# Altium PCB 信号采集板.PcbDoc (part 2 of 4)
Units mil, origin at the board's own origin, x right, y up, seen from the top; angles counter-clockwise.
Board outline 5905.51 x 1775.59 mil, 2 copper layers (Top Layer, Bottom Layer); 203 components, 126 nets, 643 pads, 227 vias.
Unrouted connection lines stored in the file: 2.
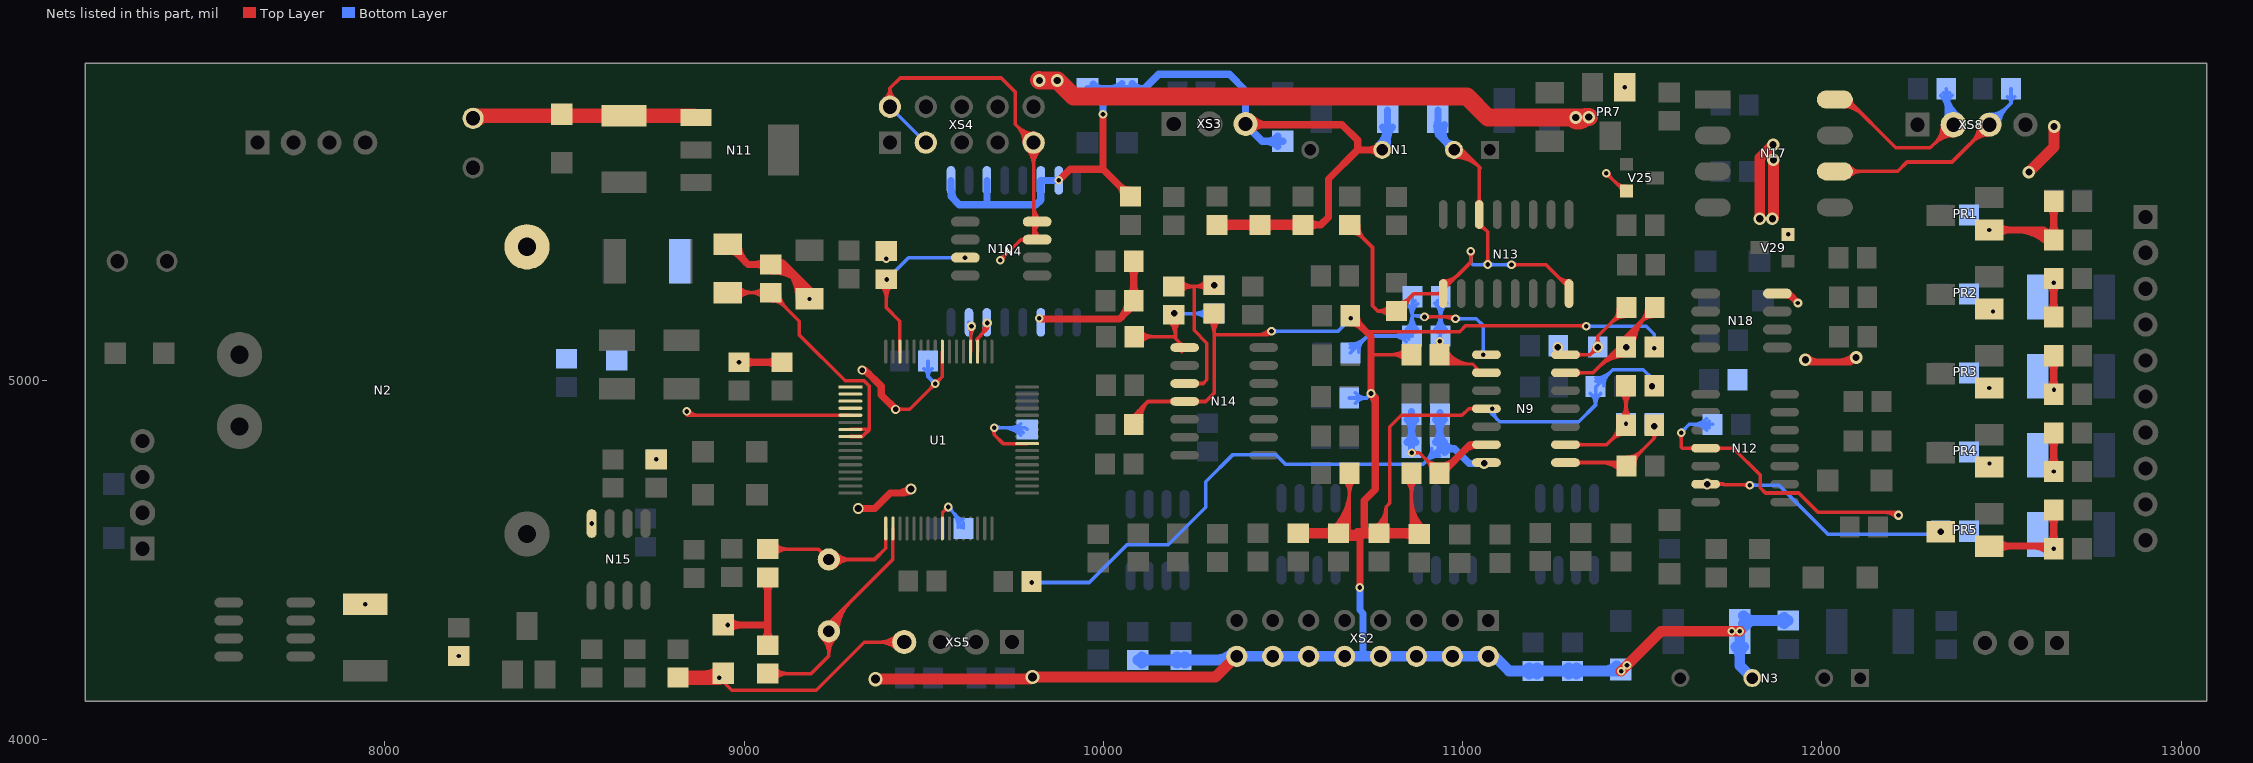
[diagram p2: the nets of this part, all layers, seen from the top]

## Via types
v1: diameter 24, hole 13, Top Layer to Bottom Layer, 112 vias
v2: diameter 30, hole 18, Top Layer to Bottom Layer, 58 vias
v3: diameter 25, hole 12, Top Layer to Bottom Layer, 22 vias
v4: diameter 26, hole 13, Top Layer to Bottom Layer, 17 vias
v5: diameter 35, hole 20, Top Layer to Bottom Layer, 12 vias
v6: diameter 40, hole 25, Top Layer to Bottom Layer, 2 vias
v7: diameter 30, hole 20, Top Layer to Bottom Layer, 2 vias
v8: diameter 25, hole 15, Top Layer to Bottom Layer, 2 vias

## Nets (pads, with @x,y where several pads share a name; then routed paths per layer and width w, separated by ;. In a path a pad name is that pad's centre, name@x,y a point inside that pad or via, vN(x,y) a via of type N, cw(c..) or ccw(c..) an arc to the next point about the centre after c; other vN are vias at no path point) (continued)
DGND: C14.2 C29.2 C30.2 C31.2 C32.2 C39.1 C40.1 C41.1 C42.1 C43.1 N4.3 N10.3 N10.4 R27.2 U1.25 U1.40 U1.56 XS4.2 XS4.3 XS4.9 | length 5881.3
  Top Layer w8: U1.25@9551.91,4588.3 9551.91,4631.9 v1(9568,4648) ; v1@9560,4648 cw(c9540.69,4648) 9554.34,4634.34 cw(c9568,4620.69) v1@9568,4640
  Top Layer w10: XS4.2@9390.73,5783.04 ccw(c9368.98,5813) 9406,5813 ; C32.2@9391.05,5343.95 ccw(c9379.1,5355.9) 9396,5355.9 ccw(c9412.9,5355.9) C32.2@9400.95,5343.95 ; v1(9396,5339) C32.2@9396,5360.74 ; XS4.2@9396.6,5774.95 ccw(c9383.22,5793.38) 9406,5793.38 ccw(c9428.78,5793.38) XS4.2@9415.4,5774.95 ; XS4.2@9406,5762 9406,5813 ; XS4.2@9421.27,5783.04 cw(c9443.02,5813) 9406,5813 ; v8(9422,4920) 9461,4920 v1(9532,4991) 9551.91,5010.9 U1.56@9551.91,5080.42 ; v8@9427.3,4914.7 cw(c9440.11,4901.89) 9440.11,4920 cw(c9440.11,4938.11) v8@9427.3,4925.3 ; v1@9525,4991 cw(c9508.1,4991) 9520.05,4979.05 cw(c9532,4967.1) v1@9532,4984 ; v1@9532,4998 ccw(c9532,5014.9) 9543.95,5002.95 ccw(c9555.9,4991) v1@9539,4991 ; v1@9691.05,4864.05 cw(c9679.1,4852.1) 9696,4852.1 cw(c9712.9,4852.1) v1@9700.95,4864.05 ; v1(9696,4869) 9696,4849.52 9721,4824.52 U1.40@9788.12,4824.52 ; v1(9713,5335) 9770,5392 ; v1@9713,5342 ccw(c9713,5358.9) 9724.95,5346.95 ccw(c9736.9,5335) v1@9720,5335 ; XS4.9@9780,5662 ccw(c9717.23,5662) 9761.62,5706.38 ccw(c9806,5750.77) XS4.9@9806,5688 ; N10.3@9783.26,5386.03 ccw(c9770,5374.28) 9770,5392 ; N10.3@9783.26,5397.97 cw(c9770,5409.72) 9770,5392 ; XS4.9@9787.62,5643.62 cw(c9743.23,5599.23) 9806,5599.23 cw(c9868.77,5599.23) XS4.9@9824.38,5643.62 ; XS4.9@9790,5662 ccw(c9751.37,5662) 9778.69,5689.31 ccw(c9806,5716.63) XS4.9@9806,5678 ; XS4.9@9794.69,5650.69 cw(c9767.37,5623.37) 9806,5623.37 cw(c9844.63,5623.37) XS4.9@9817.31,5650.69 ; N10.3@9806,5400.77 cw(c9851.23,5400.77) N10.4@9821.85,5435.16 ; 9806,5413.73 ccw(c9837.73,5413.73) N10.3@9815.29,5391.29 ; 9806,5422.47 cw(c9832.69,5422.47) N10.4@9815.35,5442.76 ; N10.4@9806,5437.87 ccw(c9861.87,5437.87) N10.3@9822.36,5398.36 ; 9806,5463.73 ccw(c9837.73,5463.73) N10.4@9815.29,5441.29 ; 9806,5487.87 ccw(c9861.87,5487.87) N10.4@9822.36,5448.36 ; 9406,5813 9435,5842 9716,5842 9755,5803 9755,5713 XS4.9@9806,5662 9806,5442 9806,5402 N10.3@9816,5392 9770,5392
  Top Layer w20: v1(8955,4319.76) R27.2@8942.52,4319.76 9064.24,4319.76 9066,4318 ; R27.2@8956.66,4305.61 cw(c8990.8,4271.47) 8990.8,4319.76 cw(c8990.8,4368.04) R27.2@8956.66,4333.9 ; v1(8986,5050.74) C30.2@9106,5050.74 ; C29.2@9000.38,5038.32 cw(c9030.36,5008.35) 9030.36,5050.74 cw(c9030.36,5093.13) C29.2@9000.38,5063.16 ; C40.1@9053.58,4275.68 ccw(c9023.61,4305.65) 9066,4305.65 ccw(c9108.39,4305.65) C40.1@9078.42,4275.68 ; C39.1@9053.58,4439.58 cw(c9023.61,4409.61) 9066,4409.61 cw(c9108.39,4409.61) C39.1@9078.42,4439.58 ; C40.1@9066,4263.26 9066,4318 ; C39.1@9066,4452 9066,4318 ; C30.2@9091.62,5038.32 ccw(c9061.64,5008.35) 9061.64,5050.74 ccw(c9061.64,5093.13) C30.2@9091.62,5063.16 ; v7(9318,4644) 9364,4644 9407,4687 9447,4687 9450,4690 9457,4690 v7(9465,4698) ; v8@9329,5026.5 cw(c9329,5001.15) 9346.92,5019.08 ; v8(9329,5029) 9337,5029 9382,4984 9382,4960 v8(9422,4920) ; 9426.37,4687 ccw(c9426.37,4736.63) v7@9461.46,4701.54 ; v1(9822,5173) 9824,5171 10045,5171 10084.74,5210.74 C14.2@10084.74,5222 C31.2@10084.74,5332 ; 10049.65,5175.65 ccw(c10007.26,5218.04) C14.2@10067.19,5219.58 ; C14.2@10072.32,5236.38 ccw(c10042.35,5266.36) 10084.74,5266.36 ccw(c10127.13,5266.36) C14.2@10097.16,5236.38 ; C31.2@10072.32,5317.62 cw(c10042.35,5287.64) 10084.74,5287.64 cw(c10127.13,5287.64) C31.2@10097.16,5317.62
  Top Layer w30: v6(9366,4169) 9797,4169 v6(9803,4175) 10312,4175 10380,4243 ; 9776.44,4169 ccw(c9776.44,4201.56) v6@9799.46,4178.54
  Bottom Layer w8: v1@9568,4640 cw(c9568,4620.69) 9581.66,4634.34 cw(c9595.31,4648) v1@9576,4648 ; v1(9568,4648) 9610.96,4605.04 C42.1@9610.96,4588.3 ; v1@9574.2,4641.8 cw(c9523.01,4590.61) C42.1@9595.4,4590.33 ; 9587.78,4628.22 cw(c9550.07,4590.51) C42.1@9603.4,4590.3 ; 9595.96,4620.04 ccw(c9610.96,4635.04) C42.1@9610.96,4613.83
  Bottom Layer w10: v1(9396,5339) v1@9406,5339 ; XS4.2@9406,5762 XS4.3@9506,5662 ; C41.1@9499.91,5032.98 cw(c9485.97,5011) 9512,5011 ; C41.1@9512,5054 9512,5011 ; C41.1@9524.09,5032.98 ccw(c9538.03,5011) 9512,5011 ; v1@9525,4991 ccw(c9508.1,4991) 9520.05,5002.95 ccw(c9532,5014.9) v1@9532,4998 ; v1(9532,4991) 9512,5011 ; v1(9696,4869) 9783.01,4869 C43.1@9788.12,4863.89 ; v1@9700.95,4864.05 cw(c9712.9,4852.1) 9712.9,4869 cw(c9712.9,4885.9) v1@9700.95,4873.95 ; 9719.36,4869 cw(c9719.36,4797.09) C43.1@9770.2,4847.94 ; 9743.5,4869 cw(c9743.5,4821.23) C43.1@9777.27,4855.01 ; 9744.03,4869 ccw(c9744.03,4906.02) C43.1@9770.2,4879.84
DP1: N4.6 U1.51 | length 175.1
  Top Layer w10: U1.51@9649.66,5109.56 cw(c9666.81,5109.56) 9654.68,5121.68 ; U1.51@9649.8,5109.15 cw(c9654.72,5112.94) 9650.33,5117.33 ; U1.51@9650.33,5080.42 9650.33,5117.33 ; 9658.33,5125.33 ccw(c9631.12,5152.54) v4@9669.1,5158.72 ; 9672.14,5139.14 ccw(c9654.88,5156.4) v4@9678.97,5160.32 ; v4(9677,5160) 9677,5144 9650.33,5117.33
  Bottom Layer w10: N4.6@9676,5162 N4.6@9677.81,5160.19
DP2: N4.7 U1.52 | length 108.3
  Top Layer w10: v4@9627.34,5145.34 cw(c9619.37,5137.37) 9630.65,5137.37 ; U1.52@9630.65,5080.42 9630.65,5148.65 v4(9633,5151) ; 9630.65,5126 cw(c9658,5126) v4@9638.66,5145.34
  Bottom Layer w10: N4.7@9626,5162 N4.7@9630.57,5157.43
FAULT1: N17.8 R68.1 XS8.2 | length 1229
  Top Layer w10: N17.8@12036,5782 12070.8,5782 12205.37,5647.43 12301.43,5647.43 XS8.2@12366,5712 ; N17.8@12061,5762 cw(c12061,5690.05) 12111.88,5740.93 ; N17.8@12061,5772 cw(c12061,5724.19) 12094.81,5758 ; N17.8@12081,5782 ccw(c12105.62,5782) 12088.21,5764.59 ; XS8.2@12335.57,5712 cw(c12262.1,5712) 12314.05,5660.05 cw(c12366,5608.1) XS8.2@12366,5681.57 ; XS8.2@12345.57,5712 cw(c12296.24,5712) 12331.12,5677.12 cw(c12366,5642.24) XS8.2@12366,5691.57
  Bottom Layer w10: R68.1@12330.05,5794.08 cw(c12291.54,5755.57) 12346,5755.57 cw(c12400.46,5755.57) R68.1@12361.95,5794.08 ; R68.1@12337.12,5801.15 cw(c12315.68,5779.71) 12346,5779.71 cw(c12376.32,5779.71) R68.1@12354.88,5801.15 ; 12346,5752.51 ccw(c12395.95,5752.51) XS8.2@12366.26,5712.35 ; 12346,5772.34 ccw(c12410.6,5772.34) XS8.2@12372.2,5720.39 ; R68.1@12346,5792.17 ccw(c12425.26,5792.17) XS8.2@12378.15,5728.43 ; XS8.2@12366,5712 12346,5732 R68.1@12346,5812 ccw(c12439.92,5812) XS8.2@12384.09,5736.47
FAULT2: N17.6 R69.1 XS8.3 | length 1085
  Top Layer w10: N17.6@12036,5582 12210.8,5582 12236.87,5608.06 12362.06,5608.06 XS8.3@12466,5712 ; N17.6@12075.14,5567.86 cw(c12109.28,5533.72) 12109.28,5582 cw(c12109.28,5630.28) N17.6@12075.14,5596.14 ; XS8.3@12437.54,5712 cw(c12368.82,5712) 12417.41,5663.41 cw(c12466,5614.82) XS8.3@12466,5683.54 ; XS8.3@12447.54,5712 cw(c12402.96,5712) 12434.48,5680.48 cw(c12466,5648.96) XS8.3@12466,5693.54
  Bottom Layer w10: XS8.3@12466,5712 12526,5772 ; XS8.3@12466,5730.46 ccw(c12466,5775.04) 12497.52,5743.52 ccw(c12529.04,5712) XS8.3@12484.46,5712 ; XS8.3@12466,5740.46 ccw(c12466,5809.18) 12514.59,5760.59 ccw(c12563.18,5712) XS8.3@12494.46,5712 ; R69.1@12515.18,5790.23 cw(c12505.22,5772) 12526,5772 ; R69.1@12526,5812 12526,5772 ; R69.1@12536.82,5790.23 ccw(c12546.78,5772) 12526,5772
GND: C2.2 C3.2 C4.2 C5.2 C7.2 C27.2 C28.2 C34.2 C35.2 C36.2 C44.2 C45.2 C48.2 C50.2 C51.2 C52.2 C53.2 C55.2 C56.2 C57.2 C58.2 C59.2 C60.2 C63.2 C64.2 C65.2 C66.2 C69.2 C70.2 N1.2 N2.3 N11.1 N12.11 N13.1 N13.8 N13.14 N15.4 N18.4 PR1.2 PR2.2 PR3.2 PR4.2 PR5.2 PR7.2 R27.1 R50.1 R51.1 R52.1 R53.1 R54.1 R73.2 R77.2 R81.2 U1.1 U1.2 U1.3 U1.4 U1.5 V7.2 V25.2 V29.2 XS5.4 | length 11566.8
  Top Layer w10: v1(8841,4914) 8851.74,4903.26 8872,4903.26 ; v1@8842.74,4903.26 8872,4903.26 ; R27.1@8931.02,4166.26 cw(c8931.02,4149.36) 8942.97,4161.31 cw(c8954.92,4173.26) R27.1@8938.02,4173.26 ; v1(8931.02,4173.26) 8966.28,4138 9201,4138 9335,4272 XS5.4@9446,4272 ; U1.5@9296,4903.26 8872,4903.26 ; XS5.4@9425.87,4251.87 ccw(c9377.28,4203.28) 9377.28,4272 ccw(c9377.28,4340.72) XS5.4@9425.87,4292.13 ; XS5.4@9432.94,4258.94 ccw(c9401.42,4227.42) 9401.42,4272 ccw(c9401.42,4316.58) XS5.4@9432.94,4285.06 ; C5.2@10686,5433.26 10749,5370.26 10749,5208 10763.74,5193.26 ; C5.2@10687.97,5410.7 cw(c10687.97,5360.99) 10723.12,5396.14 ; C5.2@10700.53,5433.26 ccw(c10735.6,5433.26) C5.2@10710.8,5408.46 ; C5.2@10710.53,5433.26 ccw(c10769.74,5433.26) 10727.87,5391.39 ; C48.2@10797.18,5178.26 ccw(c10763.74,5148.49) 10763.74,5193.26 ; C48.2@10797.18,5208.26 cw(c10763.74,5238.03) 10763.74,5193.26 ; C48.2@10804.65,5184.91 ccw(c10786.03,5168.33) 10786.03,5193.26 ccw(c10786.03,5218.19) C48.2@10804.65,5201.61 ; C48.2@10817.97,5215.82 ccw(c10817.97,5265.53) 10853.12,5230.38 ; C48.2@10830.53,5193.26 cw(c10865.6,5193.26) C48.2@10840.8,5218.06 ; C48.2@10840.53,5193.26 cw(c10899.74,5193.26) 10857.87,5235.13 ; N13.1@10941.05,5237.05 ccw(c10929.1,5225.1) 10929.1,5242 ccw(c10929.1,5258.9) N13.1@10941.05,5246.95 ; N13.1@10946,5257 ccw(c10946,5266.66) N13.1@10952.83,5259.83 ; N13.1@10946,5267 ccw(c10946,5300.8) 10969.9,5276.9 ; N13.1@10946,5277 ccw(c10946,5334.94) 10986.97,5293.97 ; N1.2@10976,5622 cw(c10976,5518.19) 11049.41,5591.59 ; N1.2@10976,5632 cw(c10976,5552.33) 11032.33,5608.67 ; 11015.26,5625.74 ccw(c10976,5586.47) N1.2@10976,5642 10999,5642 11046,5595 N13.14@11046,5462 11046,5438 11070,5414 v1(11070,5323) ; v1@11018.05,5355.05 cw(c11006.1,5343.1) 11023,5343.1 cw(c11039.9,5343.1) v1@11027.95,5355.05 ; v1(11023,5360) 11023,5330 10946,5253 N13.1@10946,5242 10864.74,5242 C48.2@10816,5193.26 10763.74,5193.26 ; N13.14@11041.05,5494.95 ccw(c11029.1,5506.9) 11046,5506.9 ccw(c11062.9,5506.9) N13.14@11050.95,5494.95 ; N13.14@11046,5427 cw(c11046,5400.44) 11064.78,5419.22 ; v1@11065.05,5327.95 ccw(c11053.1,5339.9) 11070,5339.9 ccw(c11086.9,5339.9) v1@11074.95,5327.95 ; v1(11136,5322) 11232,5322 11296,5258 N13.8@11296,5242 ; v1@11140.95,5317.05 cw(c11152.9,5305.1) 11152.9,5322 cw(c11152.9,5338.9) v1@11140.95,5326.95 ; 11263.56,5290.44 ccw(c11296,5322.87) N13.8@11296,5277 ; 11280.64,5273.36 ccw(c11296,5288.73) N13.8@11296,5267 ; v1@11400,5570 cw(c11400,5553.1) 11411.95,5565.05 cw(c11423.9,5577) v1@11407,5577 ; v1(11400,5577) 11450,5527 V25.2@11456,5527 ; 11423.56,5553.44 ccw(c11456,5585.87) V25.2@11456,5540 ; V25.2@11438.05,5538.95 cw(c11426.1,5527) V25.2@11443,5527 ; v1@11603.05,4850.05 cw(c11591.1,4838.1) 11608,4838.1 cw(c11624.9,4838.1) v1@11612.95,4850.05 ; v1(11608,4855) 11608,4815 11611.23,4811.77 N12.11@11676.16,4811.77 11753.23,4811.77 11828,4737 11828,4702 11843,4687 11935,4687 11989,4633 12209,4633 12213,4629 v4(12213,4625) ; N12.11@11643.21,4806.82 ccw(c11631.26,4794.87) 11631.26,4811.77 ccw(c11631.26,4828.67) N12.11@11643.21,4816.72 ; N12.11@11709.11,4806.82 cw(c11721.06,4794.87) 11721.06,4811.77 cw(c11721.06,4828.67) N12.11@11709.11,4816.72 ; 12174.37,4633 cw(c12174.37,4586.37) v4@12207.34,4619.34 ; 12198.51,4633 cw(c12198.51,4610.51) v4@12214.41,4626.41 ; 8872,4903.26 cw(c8872,4932.21) 8847.04,4917.55 ccw(c8872,4932.21) 8872,4903.26 ; v1@8838.41,4912.48 ccw(c8854.53,4921.95) 8854.53,4903.26 cw(c8854.53,4921.95) v1@8838.41,4912.48
  Top Layer w20: C27.2@8954.66,5379.44 9010.92,5323.18 C28.2@9074.66,5323.18 9111.82,5323.18 ; C27.2@8964.03,5359.44 cw(c8964.03,5333.78) C27.2@8982.18,5351.92 ; C27.2@8984.03,5379.44 ccw(c9054.94,5379.44) 9004.8,5329.3 ; C28.2@9060.28,5310.77 ccw(c9030.3,5280.79) 9030.3,5323.18 ccw(c9030.3,5365.57) C28.2@9060.28,5335.6 ; C28.2@9075.2,5325.16 cw(c9092.26,5301.6) 9112.83,5322.17 ; C28.2@9076.63,5305.62 cw(c9076.63,5178.28) 9166.68,5268.32 ; C28.2@9076.63,5325.62 cw(c9076.63,5246.56) 9132.53,5302.47 ; C28.2@9086.93,5308.96 cw(c9106.19,5282.37) 9129.41,5305.59 ; C28.2@9090.66,5312.62 cw(c9111.82,5296.7) 9111.82,5323.18 ; C28.2@9090.66,5333.74 ccw(c9111.82,5349.66) 9111.82,5323.18 ; 9114.12,5320.88 cw(c9020.25,5227) V7.2@9153.01,5227 ; 9148.26,5286.74 cw(c9088.53,5227) V7.2@9173.01,5227 ; v3(9182.38,5227) 9182.38,5252.62 9111.82,5323.18 ; N18.4@11876,5242 11907,5242 v3(11933,5216) ; N18.4@11902,5238 cw(c11902,5216.27) 11917.36,5231.64 ; v5(11954,5058) 11960,5052 12079,5052 12091,5064 v5(12095,5064) ; v5@11959.3,5063.3 ccw(c11986.59,5090.59) 11986.59,5052 ; 12047.92,5052 ccw(c12047.92,5111.08) v5@12089.7,5069.3 ; PR5.2@12465.84,4539.09 12637.89,4539.09 v3(12644.98,4532) C55.2@12644.98,4639.42 ; v3(12465.84,5419.09) 12617.24,5419.09 R54.1@12644.98,5391.35 C59.2@12644.98,5498.77 ; PR5.2@12489.49,4525.28 cw(c12522.83,4491.94) 12522.83,4539.09 cw(c12522.83,4586.23) PR5.2@12489.49,4552.89 ; PR1.2@12489.49,5405.28 cw(c12522.83,5371.94) 12522.83,5419.09 cw(c12522.83,5466.23) PR1.2@12489.49,5432.89 ; 12540.38,5419.09 cw(c12540.38,5288.72) R54.1@12632.56,5380.9 ; 12588.66,5419.09 cw(c12588.66,5337.01) R54.1@12646.7,5395.05 ; 12590.23,4539.09 cw(c12590.23,4479.22) R50.1@12632.56,4521.55 ; 12614.94,4539.09 ccw(c12614.94,4564) 12632.56,4546.38 ccw(c12602.59,4576.36) 12644.98,4576.36 ccw(c12687.37,4576.36) R50.1@12657.39,4546.38 ; R50.1@12621.83,4539.09 cw(c12621.83,4508.86) R50.1@12643.21,4530.23 ; R54.1@12627.44,5394.19 ccw(c12595.89,5395.77) 12618.23,5418.1 ccw(c12637.28,5437.15) R54.1@12641.94,5410.61 ; C55.2@12632.56,4625.03 cw(c12602.59,4595.06) 12644.98,4595.06 cw(c12687.37,4595.06) C55.2@12657.39,4625.03 ; R51.1@12632.56,4761.22 ccw(c12602.59,4791.2) 12644.98,4791.2 ccw(c12687.37,4791.2) R51.1@12657.39,4761.22 ; C56.2@12632.56,4839.87 cw(c12602.59,4809.9) 12644.98,4809.9 cw(c12687.37,4809.9) C56.2@12657.39,4839.87 ; R52.1@12632.56,4976.06 ccw(c12602.59,5006.04) 12644.98,5006.04 ccw(c12687.37,5006.04) R52.1@12657.39,4976.06 ; C57.2@12632.56,5054.71 cw(c12602.59,5024.74) 12644.98,5024.74 cw(c12687.37,5024.74) C57.2@12657.39,5054.71 ; R53.1@12632.56,5190.9 ccw(c12602.59,5220.87) 12644.98,5220.87 ccw(c12687.37,5220.87) R53.1@12657.39,5190.9 ; C58.2@12632.56,5269.55 cw(c12602.59,5239.57) 12644.98,5239.57 cw(c12687.37,5239.57) C58.2@12657.39,5269.55 ; R54.1@12632.56,5405.74 ccw(c12602.59,5435.71) 12644.98,5435.71 ccw(c12687.37,5435.71) R54.1@12657.39,5405.74 ; C59.2@12632.56,5484.39 cw(c12602.59,5454.41) 12644.98,5454.41 cw(c12687.37,5454.41) C59.2@12657.39,5484.39 ; v3(12644.98,4746.84) C56.2@12644.98,4854.26 ; R52.1@12644.98,4961.68 C57.2@12644.98,5069.1 ; R53.1@12644.98,5176.51 C58.2@12644.98,5283.93
  Top Layer w30: v5(11827,5450) 11827,5607 11827,5619 v5(11864,5656) ; v5(11862,5450) 11865,5453 v5(11865,5614) ; v5(12576,5580) 12646,5650 v5(12646,5707)
  Top Layer w40: C3.2@8246,5729.8 8253.2,5737 C4.2@8666,5737 8861,5737 N11.1@8866,5732 ; C3.2@8252.74,5723.06 cw(c8286.4,5689.4) 8286.4,5737 ; 8459.31,5737 ccw(c8459.31,5773.97) C2.2@8485.45,5747.83 ; C2.2@8499.59,5747.83 ccw(c8525.73,5773.97) 8525.73,5737 ; C64.2@8816,4173.26 v1(8931.02,4173.26) R27.1@8942.52,4184.76 ; 8890.62,4173.26 ccw(c8890.62,4236.65) R27.1@8935.45,4191.83
  Top Layer w50: v5@9821,5836 v5(9822,5835) v5(9872,5835) 9917,5790 11012,5790 11070,5732 v5@11341,5732 ; v5@11312.9,5724.8 ccw(c11320.87,5752.13) v5@11341,5732 ; v5@11313.36,5724.68 ccw(c11320.12,5754.88) v5@11342,5733 ; v5(11351,5733) v5@11342,5733 ; v5@11341,5732 v5@11342,5733
  Bottom Layer w10: v1@11018.05,5355.05 cw(c11006.1,5343.1) 11023,5343.1 cw(c11039.9,5343.1) v1@11027.95,5355.05 ; v1(11023,5360) 11023,5330 11022,5329 11029,5322 v1@11071,5322 ; 11050.69,5322 ccw(c11050.69,5342.31) v1@11065.05,5327.95 ; 11055.51,5322 cw(c11055.51,5308.51) v1@11065.05,5318.05 ; v1(11070,5323) v1@11071,5322 ; v1@11074.95,5318.05 cw(c11084.49,5308.51) 11084.49,5322 ; v1@11074.95,5327.95 ccw(c11089.31,5342.31) 11089.31,5322 ; v1@11131.05,5317.05 ccw(c11119.1,5305.1) 11119.1,5322 ccw(c11119.1,5338.9) v1@11131.05,5326.95 ; v1(11136,5322) v1@11071,5322 ; v1(11608,4855) 11631,4878 C44.2@11695.26,4878 ; v1@11608,4862 ccw(c11608,4878.9) 11619.95,4866.95 ccw(c11631.9,4855) v1@11615,4855 ; C44.2@11679.31,4862.05 ccw(c11640.8,4823.54) 11640.8,4878 ccw(c11640.8,4932.46) C44.2@11679.31,4893.95 ; C44.2@11686.38,4869.12 ccw(c11664.94,4847.68) 11664.94,4878 ccw(c11664.94,4908.32) C44.2@11686.38,4886.88 ; v4(12213,4625) v4@12214,4625
  Bottom Layer w20: C7.2@10931,5719.5 ccw(c10964.75,5705.13) 10938.81,5679.19 ; C7.2@10931,5752 10931,5687 N1.2@10976,5642 ; C7.2@10949.4,5711.66 ccw(c10994.11,5692.62) N1.2@10959.75,5658.25 ; N1.2@10961,5642 ccw(c10924.79,5642) 10950.39,5667.61 ccw(c10976,5693.21) N1.2@10976,5657
  other v1: 8576,4602 11451,5816
  other v3: 8206,4233.26 7946,4377 12466,4769 8756,4780.74 12646,4974 12465.84,4979.09 12476,5192 12644.98,5272 11906,5407
  other v5: 11315,5732
GNDISO1: C11.2 C12.1 C17.1 C18.1 C19.1 C20.1 C21.1 C22.1 C23.1 C24.1 C33.2 C54.2 N3.3 N9.11 N14.11 R2.1 R17.2 R18.2 R29.2 R31.2 R39.2 R41.2 R56.2 R58.2 XS2.2 XS2.4 XS2.6 XS2.8 XS2.10 XS2.12 XS2.14 XS2.16 | length 10115.3
  Top Layer w10: R56.2@10084.74,4902 10124.51,4941.77 ; R56.2@10087.25,4880.45 cw(c10125.22,4887.79) 10097.88,4915.14 ; R56.2@10097.07,4882.35 cw(c10147.54,4892.11) 10111.19,4928.45 ; R56.2@10106.89,4884.25 cw(c10169.85,4896.42) 10124.51,4941.77 ; N14.11@10193.21,4936.82 ccw(c10181.26,4924.87) 10181.26,4941.77 ccw(c10181.26,4958.67) N14.11@10193.21,4946.72 ; N14.11@10259.11,4936.82 cw(c10271.06,4924.87) 10271.06,4941.77 cw(c10271.06,4958.67) N14.11@10259.11,4946.72 ; R39.2@10292.33,5170.38 cw(c10253.82,5131.87) 10308.28,5131.87 cw(c10362.75,5131.87) R39.2@10324.24,5170.38 ; R39.2@10299.4,5177.45 cw(c10277.96,5156.01) 10308.28,5156.01 cw(c10338.6,5156.01) R39.2@10317.16,5177.45 ; R39.2@10308.28,5186.33 10308.28,5127 ; 10426.96,5127 ccw(c10426.96,5178.04) v1@10463.05,5141.95 ; 10451.1,5127 ccw(c10451.1,5153.9) v1@10470.12,5134.88 ; v1(10468,5137) 10458,5127 10308.28,5127 ; C21.1@10640.74,4590.94 ccw(c10534.53,4697.16) 10684.74,4697.16 ; C21.1@10647.82,4583.87 ccw(c10558.67,4673.02) 10684.74,4673.02 ; C21.1@10654.89,4576.8 ccw(c10582.81,4648.87) 10684.74,4648.87 ; C21.1@10661.96,4569.73 ccw(c10606.96,4624.73) 10684.74,4624.73 ; R41.2@10668.79,4724.08 cw(c10630.28,4685.57) 10684.74,4685.57 cw(c10739.2,4685.57) R41.2@10700.69,4724.08 ; C21.1@10669.03,4562.66 ccw(c10631.1,4600.59) 10684.74,4600.59 ; R41.2@10675.86,4731.15 cw(c10654.42,4709.71) 10684.74,4709.71 cw(c10715.06,4709.71) R41.2@10693.62,4731.15 ; C21.1@10676.1,4555.59 ccw(c10655.24,4576.45) 10684.74,4576.45 ; C21.1@10684,4569 10684.74,4569.74 R41.2@10684.74,4742 ; R58.2@10687.18,5180.19 10691.81,5180.19 R58.2@10694,5178 ; 10726,4574.99 10726,4594 ; 10736,5136 10992,5136 11009,5153 v1@11342,5153 ; 10747,5072 R17.2@10857.26,5072 ; C20.1@10756.86,4594.01 ccw(c10721.76,4649) 10787,4649 ; C20.1@10762.25,4585.58 ccw(c10733.41,4630.75) 10787,4630.75 ; C20.1@10767.04,4574.99 10787,4594.96 10787,4649 ; C20.1@10767.63,4577.15 ccw(c10745.06,4612.5) 10787,4612.5 ; R29.2@10841.31,4724.08 cw(c10802.8,4685.57) 10857.26,4685.57 cw(c10911.72,4685.57) R29.2@10873.21,4724.08 ; R17.2@10841.31,5056.05 ccw(c10802.8,5017.54) 10802.8,5072 ccw(c10802.8,5126.46) R17.2@10841.31,5087.95 ; R29.2@10848.38,4731.15 cw(c10826.94,4709.71) 10857.26,4709.71 cw(c10887.58,4709.71) R29.2@10866.14,4731.15 ; R17.2@10848.38,5063.12 ccw(c10826.94,5041.68) 10826.94,5072 ccw(c10826.94,5102.32) R17.2@10848.38,5080.88 ; 10857.26,4603.15 ccw(c10907.97,4603.15) C19.1@10872.11,4567.29 ; 10857.26,4627.29 ccw(c10932.11,4627.29) C19.1@10879.18,4574.36 ; 10857.26,4651.43 ccw(c10956.25,4651.43) C19.1@10886.25,4581.43 ; 10857.26,4675.57 ccw(c10980.4,4675.57) C19.1@10893.33,4588.5 ; R29.2@10857.26,4742 10857.26,4594.63 10876.9,4574.99 C19.1@10879.34,4572.55 ; N9.11@11033.21,4916.82 ccw(c11021.26,4904.87) 11021.26,4921.77 ccw(c11021.26,4938.67) N9.11@11033.21,4926.72 ; N9.11@11077.28,4916.82 ccw(c11065.33,4904.87) 11065.33,4921.77 ccw(c11065.33,4938.67) N9.11@11077.28,4926.72 ; v1(11082.23,4921.77) N9.11@11066.16,4921.77 ; 11322.27,5153 cw(c11322.27,5129.27) v1@11339.05,5146.05 ; 11331.93,5153 ccw(c11331.93,5163.07) v1@11339.05,5155.95 ; R31.2@11533.32,5092.94 R31.2@11533.4,5093.02 ; 10124.51,4941.77 N14.11@10226.16,4941.77 10284.77,4941.77 10308.28,4965.28 10308.28,5127 ; 10787,4649 10797,4659 10797,4871 10829,4903 10998,4903 11016.77,4921.77 N9.11@11066.16,4921.77 ; N9.11@11066.16,4921.77 ccw(c11066.16,4936.71) 11077.1,4926.54 cw(c11066.16,4936.71) N9.11@11066.16,4921.77 ; N9.11@11066.16,4921.77 cw(c11066.16,4906.83) 11077.1,4917 ccw(c11066.16,4906.83) N9.11@11066.16,4921.77
  Top Layer w20: R58.2@10687.18,5160.66 cw(c10687.18,5113.52) 10720.52,5146.85 ; R58.2@10687.18,5180.19 10745,5122.37 v1(10745,4964) 10757,4952 10757,4697 10726,4666 10726,4594 ; R58.2@10689,5171 cw(c10689,5153.21) R58.2@10701.58,5165.79 ; R58.2@10704.74,5178.22 ccw(c10742.38,5178.22) 10715.76,5151.61 ; v1(10714,4424) 10714,4569 ; v1@10743.59,4962.59 cw(c10711.2,4930.2) 10757,4930.2
  Top Layer w30: C22.1@10542.42,4574.99 C21.1@10654.73,4574.99 C21.1@10660.72,4569 ; C22.1@10553.27,4566.11 cw(c10574.71,4544.67) 10574.71,4574.99 cw(c10574.71,4605.31) C22.1@10553.27,4583.87 ; C21.1@10643.88,4566.11 ccw(c10622.44,4544.67) 10622.44,4574.99 ccw(c10622.44,4605.31) C21.1@10643.88,4583.87 ; C21.1@10665.58,4583.87 ccw(c10701.48,4619.78) 10701.48,4569 ; C21.1@10684,4569 10714,4569 ; 10708.01,4574.99 10726,4574.99 C20.1@10767.04,4574.99 C19.1@10876.9,4574.99 ; C20.1@10777.88,4566.11 cw(c10799.32,4544.67) 10799.32,4574.99 cw(c10799.32,4605.31) C20.1@10777.88,4583.87 ; 10841.16,4574.99 cw(c10841.16,4536.34) C19.1@10868.49,4563.67 ; v1(11457.5,4207.5) v1(11441,4191) 11552,4302 v1(11749,4302) v1(11771,4302) ; 10734.75,4574.99 ccw(c10734.75,4605.31) C20.1@10756.19,4583.87 ; 10734.75,4574.99 cw(c10734.75,4544.67) C20.1@10756.19,4566.11 ; 10734.75,4574.99 ccw(c10734.75,4605.31) C20.1@10756.19,4583.87 ; 10734.75,4574.99 cw(c10734.75,4544.67) C20.1@10756.19,4566.11 ; 10734.75,4574.99 ccw(c10734.75,4605.31) C20.1@10756.19,4583.87 ; 10734.75,4574.99 cw(c10734.75,4544.67) C20.1@10756.19,4566.11
  Bottom Layer w10: v1(10468,5137) 10653,5137 v1(10689,5173) ; v1@10472.95,5132.05 cw(c10484.9,5120.1) 10484.9,5137 cw(c10484.9,5153.9) v1@10472.95,5141.95 ; v1@10682,5173 cw(c10665.1,5173) 10677.05,5161.05 cw(c10689,5149.1) v1@10689,5166 ; C54.2@10684.43,4951.31 10732.31,4951.31 ; C54.2@10701.82,4936.94 cw(c10732.3,4911.78) 10732.3,4951.31 ; C54.2@10701.82,4965.67 ccw(c10732.3,4990.84) 10732.3,4951.31 ; v1(10745,4964) 10732.31,4951.31 ; v1@11079.39,4922.74 ccw(c11096.28,4916.96) 11083.66,4904.34 ; v1(11082.23,4921.77) 11082.23,4905.77 11103,4885 11323,4885 11369.92,4931.92 ; v1@11088.85,4919.5 ccw(c11113.18,4911.18) 11095,4893 ; v1(11344,5151) 11511,5151 11533,5129 v1(11533,5090) ; v1@11348.95,5146.05 cw(c11360.9,5134.1) 11360.9,5151 cw(c11360.9,5167.9) v1@11348.95,5155.95 ; C33.2@11355.22,4963.95 cw(c11327.7,4931.92) 11369.92,4931.92 ; C33.2@11369.92,4997.55 ccw(c11369.92,5035.28) C33.2@11396.6,5008.6 ; C33.2@11369.92,5007.55 ccw(c11369.92,5069.43) 11413.67,5025.67 ; C33.2@11384.62,4963.95 ccw(c11412.14,4931.92) 11369.92,4931.92 ; C33.2@11392.48,4984.99 cw(c11439.53,4984.99) 11406.26,5018.26 ; v2@11520.42,4991.53 ccw(c11507.8,5006) 11527,5006 ; v2(11527,4984) 11527,5006 ; v1@11528.05,5094.95 ccw(c11516.1,5106.9) 11533,5106.9 ccw(c11549.9,5106.9) v1@11537.95,5094.95 ; v2@11533.58,4991.53 cw(c11546.2,5006) 11527,5006 ; 11369.92,4931.92 C33.2@11369.92,4983.02 11371.02,4983.02 11418,5030 11503,5030 11527,5006
  Bottom Layer w20: v1(10714,4424) 10714,4361 10723,4352 10723,4234.47
  Bottom Layer w30: C24.1@10096,4222 C23.1@10216,4222 10361.04,4222 XS2.16@10371.51,4232.47 XS2.14@10471.51,4232.47 XS2.12@10571.51,4232.47 XS2.10@10671.51,4232.47 XS2.8@10771.51,4232.47 XS2.6@10871.51,4232.47 XS2.4@10971.51,4232.47 XS2.2@11071.51,4232.47 11088.83,4232.47 11129.31,4192 C18.1@11196,4192 C17.1@11306,4192 11435.72,4192 R2.1@11439.48,4195.76 ; C24.1@10106.85,4213.12 cw(c10128.29,4191.68) 10128.29,4222 cw(c10128.29,4252.32) C24.1@10106.85,4230.88 ; C23.1@10205.15,4213.12 ccw(c10183.71,4191.68) 10183.71,4222 ccw(c10183.71,4252.32) C23.1@10205.15,4230.88 ; C23.1@10226.85,4213.12 cw(c10248.29,4191.68) 10248.29,4222 cw(c10248.29,4252.32) C23.1@10226.85,4230.88 ; 10311.16,4222 ccw(c10311.16,4292.83) XS2.16@10361.24,4242.74 ; C18.1@11185.15,4183.12 ccw(c11163.71,4161.68) 11163.71,4192 ccw(c11163.71,4222.32) C18.1@11185.15,4200.88 ; C18.1@11206.85,4183.12 cw(c11228.29,4161.68) 11228.29,4192 cw(c11228.29,4222.32) C18.1@11206.85,4200.88 ; C17.1@11295.15,4183.12 ccw(c11273.71,4161.68) 11273.71,4192 ccw(c11273.71,4222.32) C17.1@11295.15,4200.88 ; C17.1@11316.85,4183.12 cw(c11338.29,4161.68) 11338.29,4192 cw(c11338.29,4222.32) C17.1@11316.85,4200.88 ; 11394.2,4192 ccw(c11394.2,4241.04) R2.1@11428.87,4206.36 ; C11.2@11760.39,4258.89 cw(c11734.79,4233.29) 11771,4233.29 cw(c11807.21,4233.29) C11.2@11781.61,4258.89 ; C11.2@11781.61,4323.89 cw(c11801.18,4304.32) 11801.18,4332 ; C11.2@11781.61,4345.11 ccw(c11813.25,4376.75) 11813.25,4332 ; N3.3@11806,4172 11771,4207 v1(11771,4302) 11801,4332 C12.1@11906,4332 ; C12.1@11895.15,4323.12 ccw(c11873.71,4301.68) 11873.71,4332 ccw(c11873.71,4362.32) C12.1@11895.15,4340.88
GNDISO2: C1.2 C13.1 C15.2 C16.2 N1.3 N4.9 N4.11 N4.14 N4.15 R1.1 R14.2 V2.A V4.A XS3.3 | length 3694.2
  Top Layer w20: v1(9876,5557) 9907,5588 9999,5588 ; v1(9999,5741) 9999,5588 ; 10043.37,5543.63 cw(c10011.74,5512) C13.1@10056.47,5512 ; 10045.71,5541.29 ccw(c10074.03,5569.61) C13.1@10074.03,5529.56 ; C13.1@10076,5512 10075,5512 9999,5588 ; XS3.3@10396,5712 10664.43,5712 10707.81,5668.61 10707.81,5642 ; XS3.3@10412.59,5697.41 cw(c10447.82,5662.18) 10447.82,5712 ; XS3.3@10412.59,5730.59 ccw(c10457.48,5775.48) 10457.48,5712 ; R14.2@10556,5433.26 10605.37,5433.26 10626.63,5454.52 10626.63,5560.82 10707.81,5642 ; R14.2@10570.38,5420.84 cw(c10600.36,5390.87) 10600.36,5433.26 cw(c10600.36,5475.65) R14.2@10570.38,5445.68 ; N1.3@10765.39,5631.39 ccw(c10739.79,5605.79) 10739.79,5642 ccw(c10739.79,5678.21) N1.3@10765.39,5652.61 ; N1.3@10776,5642 10707.81,5642
  Top Layer w30: C15.2@10316,5433.26 C16.2@10436,5433.26 R14.2@10556,5433.26 ; C15.2@10326.85,5424.38 cw(c10348.29,5402.94) 10348.29,5433.26 cw(c10348.29,5463.58) C15.2@10326.85,5442.14 ; C16.2@10425.15,5424.38 ccw(c10403.71,5402.94) 10403.71,5433.26 ccw(c10403.71,5463.58) C16.2@10425.15,5442.14 ; C16.2@10446.85,5424.38 cw(c10468.29,5402.94) 10468.29,5433.26 cw(c10468.29,5463.58) C16.2@10446.85,5442.14 ; R14.2@10545.15,5424.38 ccw(c10523.71,5402.94) 10523.71,5433.26 ccw(c10523.71,5463.58) R14.2@10545.15,5442.14
  Bottom Layer w20: N4.9@9576,5557 9576,5512 9599,5489 9641,5489 9656,5489 9813,5489 9826,5502 N4.14@9826,5557 v1(9876,5557) ; N4.9@9578,5528.94 ccw(c9620.72,5527.72) 9590.5,5497.5 ; 9676,5490 N4.11@9676,5557 ; V4.A@9956,5812 9999,5812 ; V4.A@9971.69,5799.1 cw(c9999,5776.65) 9999,5812 ; V4.A@9971.69,5824.9 ccw(c9999,5847.35) 9999,5812 ; v1(9999,5741) 9999,5812 ; V2.A@10051.64,5797.64 ccw(c10016.96,5762.96) 10016.96,5812 ccw(c10016.96,5861.04) V2.A@10051.64,5826.36 ; V2.A@10080.58,5797.85 cw(c10114.03,5765.38) 10114.03,5812 ; V2.A@10080.58,5826.15 ccw(c10114.03,5858.62) 10114.03,5812 ; R1.1@10485.34,5651.61 ccw(c10451.2,5617.47) 10451.2,5665.76 ccw(c10451.2,5714.04) R1.1@10485.34,5679.9 ; R1.1@10499.48,5665.76 10442.24,5665.76 10396,5712 10396,5807.2 10351.04,5852.16 10154.19,5852.16 10114.03,5812 ; N1.3@10765.39,5652.61 ccw(c10703.57,5714.43) C1.2@10791,5714.43 ; N1.3@10776,5642 10791,5657 C1.2@10791,5752 ; C1.2@10776.86,5705.36 cw(c10742.72,5671.22) 10791,5671.22 cw(c10839.28,5671.22) C1.2@10805.14,5705.36 ; N1.3@10779.54,5638.46 ccw(c10751.86,5666.14) 10791,5666.14 ; 9999,5812 V2.A@10066,5812 10114.03,5812
NetC25_1: C25.1 N9.2 R18.1 R20.1 | length 757.7
  Top Layer w10: N9.2@11286.16,4821.77 11400.81,4821.77 R20.1@11454.58,4875.54 R18.1@11454.58,4985.54 ; N9.2@11319.11,4816.82 cw(c11331.06,4804.87) 11331.06,4821.77 cw(c11331.06,4838.67) N9.2@11319.11,4826.72 ; 11412.71,4833.67 cw(c11454.58,4791.8) R20.1@11454.58,4851.02 ; 11417.46,4838.42 ccw(c11382.31,4873.57) R20.1@11432.02,4873.57 ; R20.1@11429.78,4850.74 cw(c11454.58,4825.94) R20.1@11454.58,4861.02 ; R20.1@11438.63,4893.46 ccw(c11400.12,4931.97) 11454.58,4931.97 ccw(c11509.04,4931.97) R20.1@11470.53,4893.46 ; R18.1@11438.63,4967.62 cw(c11400.12,4929.11) 11454.58,4929.11 cw(c11509.04,4929.11) R18.1@11470.53,4967.62 ; R20.1@11438.75,4859.71 ccw(c11418.43,4880.02) R20.1@11447.16,4880.02 ; R20.1@11445.7,4886.39 ccw(c11424.26,4907.83) 11454.58,4907.83 ccw(c11484.9,4907.83) R20.1@11463.46,4886.39 ; R18.1@11445.7,4974.69 cw(c11424.26,4953.25) 11454.58,4953.25 cw(c11484.9,4953.25) R18.1@11463.46,4974.69 ; R20.1@11449.36,4885.33 ccw(c11436.74,4897.94) R20.1@11454.58,4897.94 ; R20.1@11454.58,4898.32 ccw(c11472.96,4898.32) R20.1@11459.96,4885.33
  other v3: 11454.66,4880.02
NetC25_2: C25.2 N9.1 R20.2 R23.1 | length 661.6
  Top Layer w10: N9.1@11286.16,4771.77 11446.23,4771.77 R23.1@11456,4762 11533.32,4839.32 ; N9.1@11319.11,4766.82 cw(c11331.06,4754.87) 11331.06,4771.77 cw(c11331.06,4788.67) N9.1@11319.11,4776.72 ; 11382.71,4771.77 cw(c11382.71,4690.67) R23.1@11440.05,4748.02 ; 11406.85,4771.77 cw(c11406.85,4714.82) R23.1@11447.12,4755.09 ; 11420.37,4771.77 ccw(c11420.37,4799.6) R23.1@11440.05,4779.92 ; R23.1@11456,4776.53 ccw(c11456,4811.6) R23.1@11480.8,4786.8 ; R23.1@11456,4786.53 ccw(c11456,4845.74) 11497.87,4803.87 ; R23.1@11478.56,4763.97 cw(c11528.27,4763.97) 11493.12,4799.12 ; R20.2@11524.41,4852.85 cw(c11518.6,4839.32) 11533.32,4839.32 ; R20.2@11526.33,4865.95 cw(c11509.45,4849.07) R20.2@11533.32,4849.07 ; R20.2@11533.32,4848.69 cw(c11557.73,4848.69) R20.2@11540.47,4865.95 ; R20.2@11533.32,4875.54 11533.32,4839.32 ; R20.2@11542.23,4852.85 ccw(c11548.04,4839.32) 11533.32,4839.32
  other v2: 11533.4,4873.02
NetC26_1: C26.1 N9.9 R17.1 R19.1 | length 997.8
  Top Layer w8: R17.1@10927.12,5095.79 ccw(c10921.74,5109) v1(10936,5109) ; R17.1@10929.11,5065.15 ccw(c10966.14,5091.37) 10966.14,5046 ; v1@10930.34,5103.34 cw(c10916.69,5089.69) 10936,5089.69 cw(c10955.31,5089.69) v1@10941.66,5103.34 ; R17.1@10935.64,5069.78 ccw(c10981.6,5102.31) 10981.6,5046 ; R17.1@10942.17,5074.4 ccw(c10997.07,5113.26) 10997.07,5046 ; R17.1@10944.88,5095.79 cw(c10950.26,5109) v1(10936,5109) ; R17.1@10948.7,5079.02 ccw(c11012.53,5124.21) 11012.53,5046 ; R17.1@10955.23,5083.64 ccw(c11028,5135.15) 11028,5046 ; 11031.77,5042.23 cw(c11015.43,5025.89) N9.9@11038.16,5021.77 ; N9.9@11066.16,5021.77 11052.23,5021.77 11028,5046 ; v1(10936,5109) R17.1@10936,5072 10962,5046 11028,5046
  Bottom Layer w10: C26.1@10922.05,5141.92 ccw(c10883.54,5180.43) 10938,5180.43 ccw(c10992.46,5180.43) C26.1@10953.95,5141.92 ; R19.1@10923.05,5215.08 cw(c10886.95,5178.98) 10938,5178.98 ; C26.1@10929.12,5134.85 ccw(c10907.68,5156.29) 10938,5156.29 ccw(c10968.32,5156.29) C26.1@10946.88,5134.85 ; R19.1@10930.12,5222.15 cw(c10911.09,5203.13) 10938,5203.13 ; C26.1@10931.05,5113.95 ccw(c10914.27,5130.73) C26.1@10938,5130.73 ; C26.1@10938,5121.07 ccw(c10948.07,5121.07) C26.1@10940.95,5113.95 ; C26.1@10938,5124 10938,5232 R19.1@10939,5233 ; 10938,5174.15 cw(c10995.88,5174.15) R19.1@10954.95,5215.08 ; 10938,5198.3 cw(c10971.73,5198.3) R19.1@10947.88,5222.15
NetC26_2: C26.2 N9.8 R19.2 R21.1 | length 1216.8
  Top Layer w10: v1(10894,5177) 10975,5177 v1(10980,5172) ; v1@10898.95,5172.05 cw(c10910.9,5160.1) 10910.9,5177 cw(c10910.9,5193.9) v1@10898.95,5181.95 ; 10951.03,5177 cw(c10951.03,5143.03) v1@10975.05,5167.05 ; N9.8@11044.81,5071.77 N9.8@11066.16,5071.77
  Bottom Layer w10: R21.1@10688,5077 10735,5124 C26.2@10859.26,5124 10859.26,5180 ; R21.1@10688,5091.53 ccw(c10688,5126.6) R21.1@10712.8,5101.8 ; R21.1@10688,5101.53 ccw(c10688,5160.74) 10729.87,5118.87 ; R21.1@10710.56,5078.97 cw(c10760.27,5078.97) 10725.12,5114.12 ; C26.2@10843.31,5108.05 ccw(c10804.8,5069.54) 10804.8,5124 ccw(c10804.8,5178.46) C26.2@10843.31,5139.95 ; C26.2@10843.4,5142.01 ccw(c10805.84,5180) 10859.26,5180 ; R19.2@10844.53,5214.86 cw(c10810.63,5179.99) 10859.26,5179.99 ; C26.2@10850.38,5115.12 ccw(c10828.94,5093.68) 10828.94,5124 ccw(c10828.94,5154.32) C26.2@10850.38,5132.88 ; C26.2@10850.43,5134.9 ccw(c10829.52,5156.05) 10859.26,5156.05 ccw(c10889,5156.05) C26.2@10868.09,5134.9 ; 10859.26,5201.66 cw(c10885.3,5201.66) R19.2@10868.41,5221.47 ; R19.2@10860.26,5233 10859.26,5232 10859.26,5180 ; 10869.86,5180 cw(c10869.86,5152.86) v1@10889.05,5172.05 ; R19.2@10874.89,5213.86 ccw(c10903.77,5179.99) 10859.26,5179.99 ; C26.2@10875.12,5142.01 cw(c10912.68,5180) 10859.26,5180 ; v1(10894,5177) 10891,5180 10859.26,5180 ; v1(10980,5172) 11038,5172 11057,5153 v1(11057,5072) ; v1@10984.95,5167.05 cw(c10996.9,5155.1) 10996.9,5172 cw(c10996.9,5188.9) v1@10984.95,5176.95 ; v1@11052.05,5076.95 ccw(c11040.1,5088.9) 11057,5088.9 ccw(c11073.9,5088.9) v1@11061.95,5076.95
NetC27_1: C27.1 C28.1 U1.7 U1.8 | length 1166
  Top Layer w10: C27.1@8954.66,5244.44 9068.36,5244.44 9071.51,5241.29 C28.1@9074.66,5244.44 9154.1,5165 9154.1,5126.9 9282,4999 9334,4999 9349,4984 9349,4863.89 ; C27.1@8974.64,5233.83 cw(c9000.24,5208.23) 9000.24,5244.44 cw(c9000.24,5280.65) C27.1@8974.64,5255.05 ; C27.1@8981.71,5226.76 cw(c9024.39,5184.09) 9024.39,5244.44 cw(c9024.39,5304.8) C27.1@8981.71,5262.12 ; C28.1@9056.74,5228.49 ccw(c9018.23,5189.98) 9018.23,5244.44 ccw(c9018.23,5298.9) C28.1@9056.74,5260.39 ; C28.1@9063.81,5235.56 ccw(c9042.37,5214.12) 9042.37,5244.44 ccw(c9042.37,5274.76) C28.1@9063.81,5253.32 ; C28.1@9076.63,5221.88 cw(c9076.63,5172.17) 9111.78,5207.32 ; C28.1@9089.19,5244.44 ccw(c9124.26,5244.44) C28.1@9099.46,5219.64 ; C28.1@9099.19,5244.44 ccw(c9158.4,5244.44) 9116.53,5202.57 ; U1.8@9296,4844.2 9329.31,4844.2 9349,4863.89 ; U1.7@9296,4863.89 9349,4863.89 ; U1.8@9325.13,4843.53 ccw(c9325.13,4852.01) 9331.13,4846.02
NetC32_1: C32.1 N10.7 U1.62 | length 674.3
  Top Layer w10: C32.1@9380.05,5266.05 cw(c9341.54,5227.54) 9396,5227.54 cw(c9450.46,5227.54) C32.1@9411.95,5266.05 ; C32.1@9387.12,5273.12 cw(c9365.68,5251.68) 9396,5251.68 cw(c9426.32,5251.68) C32.1@9404.88,5273.12 ; C32.1@9392.05,5276.05 cw(c9382.51,5266.51) C32.1@9396,5266.51 ; C32.1@9396,5261.69 cw(c9416.31,5261.69) C32.1@9401.95,5276.05 ; C32.1@9396,5282 9396,5203 9433.8,5165.2 U1.62@9433.8,5080.42 ; v1(9615,5342) N10.7@9616,5342
  Bottom Layer w10: v1(9397,5281) 9458,5342 v1(9615,5342) ; v1@9397,5288 ccw(c9397,5304.9) 9408.95,5292.95 ccw(c9420.9,5281) v1@9404,5281 ; v1@9610.05,5337.05 ccw(c9598.1,5325.1) 9598.1,5342 ccw(c9598.1,5358.9) v1@9610.05,5346.95
NetC37_1: C37.1 N9.13 R29.1 R32.1 | length 781.3
  Top Layer w10: v1(10858,4799) 10879,4799 R29.1@10936,4742 ; v1@10862.95,4794.05 cw(c10874.9,4782.1) 10874.9,4799 cw(c10874.9,4815.9) v1@10862.95,4803.95 ; 10894.13,4783.87 ccw(c10936,4825.74) R29.1@10936,4766.53 ; 10898.88,4779.12 cw(c10863.73,4743.97) R29.1@10913.44,4743.97 ; R29.1@10911.2,4766.8 ccw(c10936,4791.6) R29.1@10936,4756.53
  Top Layer w20: R29.1@10936,4742 10941.67,4742 11021.44,4821.77 N9.13@11066.16,4821.77 ; R29.1@10936,4761.53 ccw(c10936,4822.36) 10979.01,4779.34 ; R29.1@10953.56,4743.97 cw(c10977.51,4743.97) R29.1@10960.57,4760.91 ; 11006.2,4806.53 cw(c11038.16,4774.56) N9.13@11038.16,4819.77 ; 11013.08,4813.41 cw(c11030.86,4795.63) N9.13@11037.62,4819.84
  Bottom Layer w20: R32.1@10845.58,4828.38 ccw(c10815.61,4858.36) 10858,4858.36 ccw(c10900.39,4858.36) R32.1@10870.42,4828.38 ; C37.1@10845.58,4891.62 cw(c10815.61,4861.64) 10858,4861.64 cw(c10900.39,4861.64) C37.1@10870.42,4891.62 ; v1(10858,4799) R32.1@10858,4814 C37.1@10858,4914
NetC37_2: C37.2 N9.14 R32.2 R33.1 | length 1934.5
  Top Layer w20: v2(11059.7,4769.48) N9.14@11063.64,4773.42
  Bottom Layer w10: v1(9801,4438) 9961,4438 10066,4543 10181,4543 10285,4647 10285,4718 10361,4794 10480,4794 10507,4767 10889.74,4767 R32.2@10936.74,4814 ; v1@9805.95,4433.05 cw(c9817.9,4421.1) 9817.9,4438 cw(c9817.9,4454.9) v1@9805.95,4442.95 ; 10894.87,4772.13 cw(c10936.74,4730.26) R32.2@10936.74,4789.47 ; 10899.62,4776.88 ccw(c10864.47,4812.03) R32.2@10914.18,4812.03 ; R32.2@10911.94,4789.2 cw(c10936.74,4764.4) R32.2@10936.74,4799.47 ; C37.2@10936.74,4911 C37.2@10936.74,4914
  Bottom Layer w20: R32.2@10924.32,4828.38 ccw(c10894.35,4858.36) 10936.74,4858.36 ccw(c10979.13,4858.36) R32.2@10949.16,4828.38 ; C37.2@10924.32,4891.62 cw(c10894.35,4861.64) 10936.74,4861.64 cw(c10979.13,4861.64) C37.2@10949.16,4891.62 ; C37.2@10936.74,4911 R32.2@10936.74,4814 10940.5,4810.24 10977.24,4810.24 ; R32.2@10949.16,4799.62 cw(c10974.81,4773.97) 10974.81,4810.24 ; R32.2@10950.4,4823.06 ccw(c10977.24,4844.73) 10977.24,4810.24 ; v2(11059.7,4769.48) 11018,4769.48 10977.24,4810.24
NetC38_1: C38.1 N9.6 R28.1 R31.1 | length 950.2
  Top Layer w10: N9.6@11286.16,5021.77 11362.77,5021.77 R31.1@11434.02,5093.02 ; N9.6@11319.11,5016.82 cw(c11331.06,5004.87) 11331.06,5021.77 cw(c11331.06,5038.67) N9.6@11319.11,5026.72 ; 11377.56,5036.56 cw(c11454.66,4959.46) R31.1@11454.66,5068.5 ; 11394.63,5053.63 cw(c11454.66,4993.6) R31.1@11454.66,5078.5 ; 11411.7,5070.7 cw(c11454.66,5027.74) R31.1@11454.66,5088.5 ; R31.1@11446.81,5086.83 ccw(c11434.02,5076.73) R31.1@11434.02,5093.02 ; R31.1@11446.81,5099.22 cw(c11434.02,5109.32) R31.1@11434.02,5093.02 ; R31.1@11447.22,5094.99 cw(c11496.93,5094.99) 11461.78,5130.14 ; v2(11454.66,5093.02) R31.1@11434.02,5093.02 ; 11454.66,5123.02 R28.1@11534.66,5203.02 ; R31.1@11457.22,5094.99 cw(c11531.07,5094.99) 11478.85,5147.21 ; R31.1@11467.22,5094.99 cw(c11565.21,5094.99) 11495.92,5164.28 ; R31.1@11477.22,5094.99 cw(c11599.36,5094.99) R28.1@11512.99,5181.36 ; 11492.79,5161.15 cw(c11534.66,5119.28) R28.1@11534.66,5178.5 ; 11497.54,5165.9 ccw(c11462.39,5201.06) R28.1@11512.1,5201.06 ; R28.1@11509.86,5178.22 cw(c11534.66,5153.42) R28.1@11534.66,5188.5
NetC38_2: C38.2 N9.7 R28.2 R34.1 | length 458.4
  Top Layer w10: N9.7@11284.97,5071.77 N9.7@11286.16,5071.77 11354.67,5071.77 v2(11375.92,5093.02) 11375.92,5123.02 R28.2@11455.92,5203.02 ; N9.7@11319.11,5066.82 cw(c11331.06,5054.87) 11331.06,5071.77 cw(c11331.06,5088.67) N9.7@11319.11,5076.72 ; v2@11365.92,5093.02 cw(c11341.78,5093.02) 11358.85,5075.95 cw(c11375.92,5058.88) v2@11375.92,5083.02 ; v2@11368.85,5100.09 ccw(c11351.78,5117.17) 11375.92,5117.17 ccw(c11400.06,5117.17) v2@11382.99,5100.09 ; 11414.05,5161.15 cw(c11455.92,5119.28) R28.2@11455.92,5178.5 ; 11418.8,5165.9 ccw(c11383.65,5201.06) R28.2@11433.36,5201.06 ; R28.2@11431.12,5178.22 cw(c11455.92,5153.42) R28.2@11455.92,5188.5
  other v2: 11264.43,5092.31
NetC39_2: C39.2 U1.17 Y1.1 | length 727.2
  Top Layer w10: C39.2@9066,4530.74 9207.26,4530.74 Y1.1@9236,4502 9363.09,4502 9394.42,4533.34 U1.17@9394.42,4588.3 ; C39.2@9076.85,4521.86 cw(c9098.29,4500.42) 9098.29,4530.74 cw(c9098.29,4561.06) C39.2@9076.85,4539.62 ; C39.2@9083.92,4514.79 cw(c9122.43,4476.28) 9122.43,4530.74 cw(c9122.43,4585.2) C39.2@9083.92,4546.69 ; Y1.1@9247.31,4490.69 cw(c9274.63,4463.37) 9274.63,4502 cw(c9274.63,4540.63) Y1.1@9247.31,4513.31 ; Y1.1@9254.38,4483.62 cw(c9298.77,4439.23) 9298.77,4502 cw(c9298.77,4564.77) Y1.1@9254.38,4520.38
  Bottom Layer w10: Y1.1@9217.26,4520.74 Y1.1@9236,4502
NetC40_2: C40.2 U1.18 Y1.2 | length 1159.8
  Top Layer w10: C40.2@9066,4184.52 9187.34,4184.52 9236,4233.18 Y1.2@9236,4302 9236,4323.73 9414.11,4501.84 U1.18@9414.11,4588.3 ; C40.2@9076.85,4175.64 cw(c9098.29,4154.2) 9098.29,4184.52 cw(c9098.29,4214.84) C40.2@9076.85,4193.4 ; C40.2@9083.92,4168.57 cw(c9122.43,4130.06) 9122.43,4184.52 cw(c9122.43,4238.98) C40.2@9083.92,4200.47 ; Y1.2@9217.62,4283.62 cw(c9173.23,4239.23) 9236,4239.23 cw(c9298.77,4239.23) Y1.2@9254.38,4283.62 ; Y1.2@9224.69,4290.69 cw(c9197.37,4263.37) 9236,4263.37 cw(c9274.63,4263.37) Y1.2@9247.31,4290.69 ; Y1.2@9232,4302 cw(c9274.81,4302) 9244.54,4332.27 ; Y1.2@9242,4302 cw(c9308.95,4302) 9261.61,4349.34 ; Y1.2@9252,4302 cw(c9343.09,4302) 9278.68,4366.41 ; Y1.2@9262,4302 cw(c9377.24,4302) 9295.75,4383.48
NetC45_1: C45.1 N12.13 PR5.W | length 890.6
  Top Layer w10: v2(11680.4,4711.77) N12.13@11676.16,4711.77 11675.93,4712 11725,4712 11727,4710 v1@11799,4710 ; N12.13@11687.48,4704.7 cw(c11705.1,4687.07) N12.13@11705.1,4712 ; N12.13@11687.48,4718.84 ccw(c11703.99,4735.35) N12.13@11703.99,4712 ; N12.13@11709.11,4706.82 cw(c11721.62,4694.31) 11721.62,4712 ; N12.13@11709.11,4716.72 ccw(c11720.5,4728.11) 11720.5,4712 ; 11779.69,4710 cw(c11779.69,4689.69) v1@11794.05,4704.05 ; 11784.51,4710 ccw(c11784.51,4723.49) v1@11794.05,4713.95
  Bottom Layer w10: v1(11799,4709) 11880.02,4709 12016.39,4572.63 12324.39,4572.63 v2(12330.84,4579.09) cw(c12315.25,4594.67) C45.1@12315.25,4572.63 ; v1@11803.95,4704.05 cw(c11815.9,4692.1) 11815.9,4709 cw(c11815.9,4725.9) v1@11803.95,4713.95 ; 12291.11,4572.63 ccw(c12291.11,4618.82) C45.1@12323.77,4586.16
NetC46_1: C46.1 N14.10 R39.1 R42.1 | length 744.9
  Top Layer w10: R42.1@10196,5262 10252.61,5262 ; R42.1@10206.85,5253.12 cw(c10228.29,5231.68) 10228.29,5262 cw(c10228.29,5292.32) R42.1@10206.85,5270.88 ; R42.1@10213.92,5246.05 cw(c10252.43,5207.54) 10252.43,5262 cw(c10252.43,5316.46) R42.1@10213.92,5277.95 ; N14.10@10226.16,4991.77 10278.05,4991.77 10288.05,5001.76 10288.05,5068 10288.05,5104.13 10252.61,5139.57 10252.61,5262 ; N14.10@10259.11,4986.82 cw(c10271.06,4974.87) 10271.06,4991.77 cw(c10271.06,5008.67) N14.10@10259.11,4996.72 ; 10259.27,5262 cw(c10259.27,5218.02) R39.1@10290.36,5249.12 ; 10273.56,5262 ccw(c10273.56,5291.57) R39.1@10296.55,5272.97 ; 10276.73,5262 ccw(c10276.73,5296.63) R39.1@10301.21,5272.14 ; R39.1@10288.78,5279.26 cw(c10252.61,5308.52) 10252.61,5262 ; R39.1@10291.56,5262 cw(c10291.56,5248.34) R39.1@10301.21,5258 ; R39.1@10299.86,5261.61 10299.46,5262 10252.61,5262
  other v2: 10308.28,5265.07
NetC46_2: C46.2 N14.8 R42.2 R44.1 | length 844.3
  Top Layer w10: R44.1@10086,5122 10195.93,5122 10201.43,5116.5 ; R44.1@10094.88,5113.12 cw(c10116.32,5091.68) 10116.32,5122 cw(c10116.32,5152.32) R44.1@10094.88,5130.88 ; R44.1@10101.95,5106.05 cw(c10140.46,5067.54) 10140.46,5122 cw(c10140.46,5176.46) R44.1@10101.95,5137.95 ; R42.2@10182.02,5167.31 cw(c10135.14,5120.43) 10201.43,5120.43 ; R42.2@10189.09,5174.38 cw(c10159.28,5144.58) 10201.43,5144.58 ; R42.2@10190.43,5179.73 cw(c10163.85,5153.16) 10201.43,5153.16 ; 10201.43,5137.16 cw(c10244.07,5137.16) R42.2@10213.92,5167.31 ; R42.2@10201.43,5172.17 cw(c10212.13,5172.17) R42.2@10204.57,5179.73 ; R42.2@10201.43,5182.87 10201.43,5116.5 ; 10205.89,5112.04 cw(c10190.2,5096.35) N14.8@10209.43,5085.28 ; N14.8@10215.12,5102.81 cw(c10201.91,5089.61) N14.8@10218.1,5080.29 ; N14.8@10226.16,5091.77 10201.43,5116.5
  Bottom Layer w10: v2(10197.5,5186.8) 10197.97,5186.33 C46.2@10308.28,5186.33 ; v2@10204.57,5179.73 cw(c10220.5,5163.8) 10220.5,5186.33 ; v2@10204.57,5193.87 ccw(c10222.78,5212.09) 10222.78,5186.33 ; C46.2@10290.36,5170.38 ccw(c10251.85,5131.87) 10251.85,5186.33 ccw(c10251.85,5240.79) C46.2@10290.36,5202.28 ; C46.2@10297.43,5177.45 ccw(c10275.99,5156.01) 10275.99,5186.33 ccw(c10275.99,5216.65) C46.2@10297.43,5195.21